# Altium PCB TMS320VC5509AMINI.PcbDoc
Units mil, origin at the board's own origin, x right, y up, seen from the top; angles counter-clockwise.
Board outline 2095.64 x 1938.16 mil, 4 copper layers (Top Layer, GND, VCC, Bottom Layer); 68 components, 111 nets, 395 pads, 0 vias.
Unrouted connection lines stored in the file: 263.
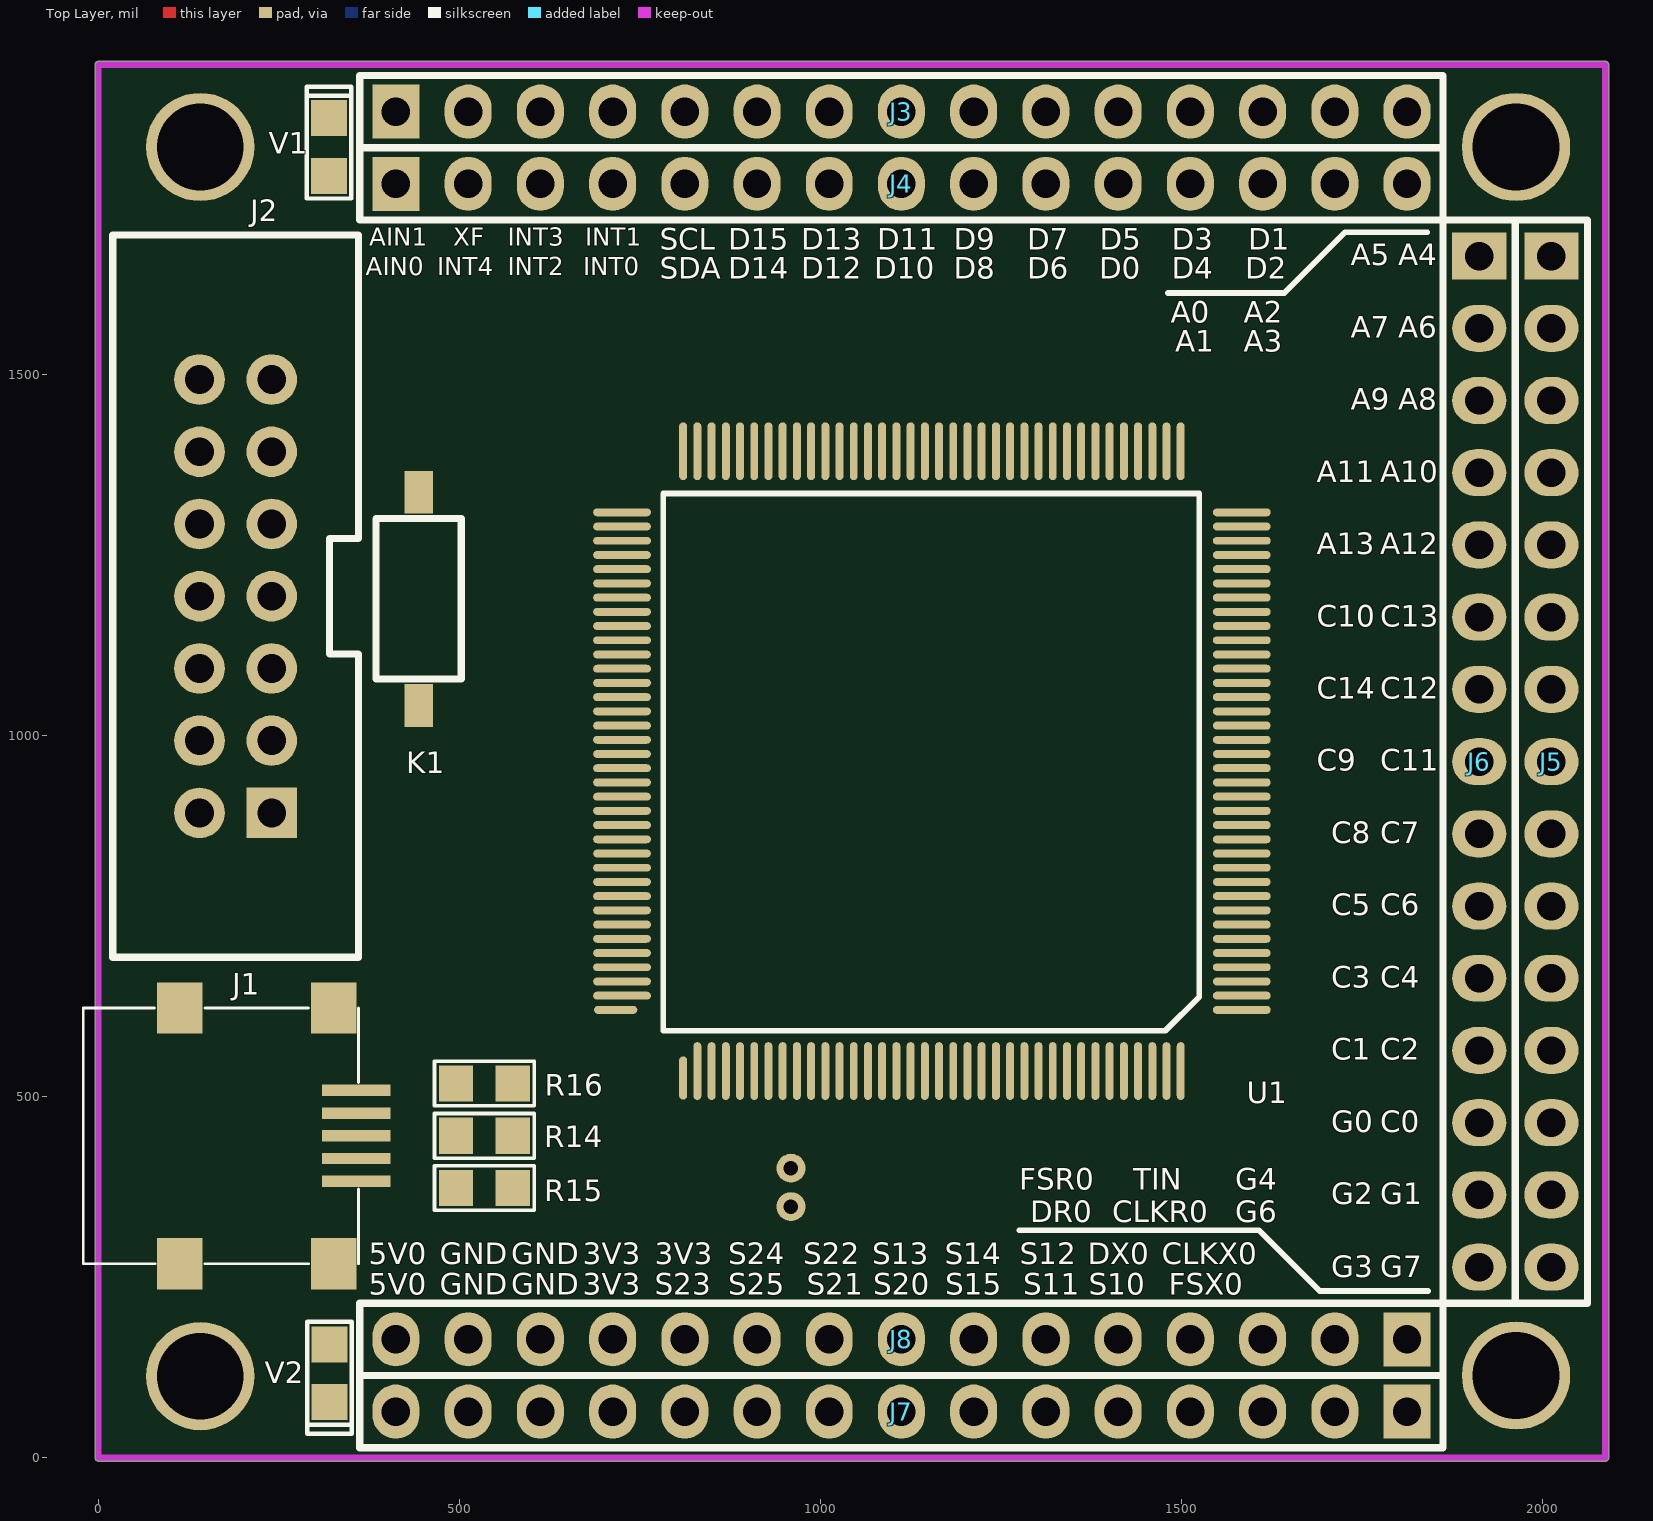
[diagram p0: Top Layer view]
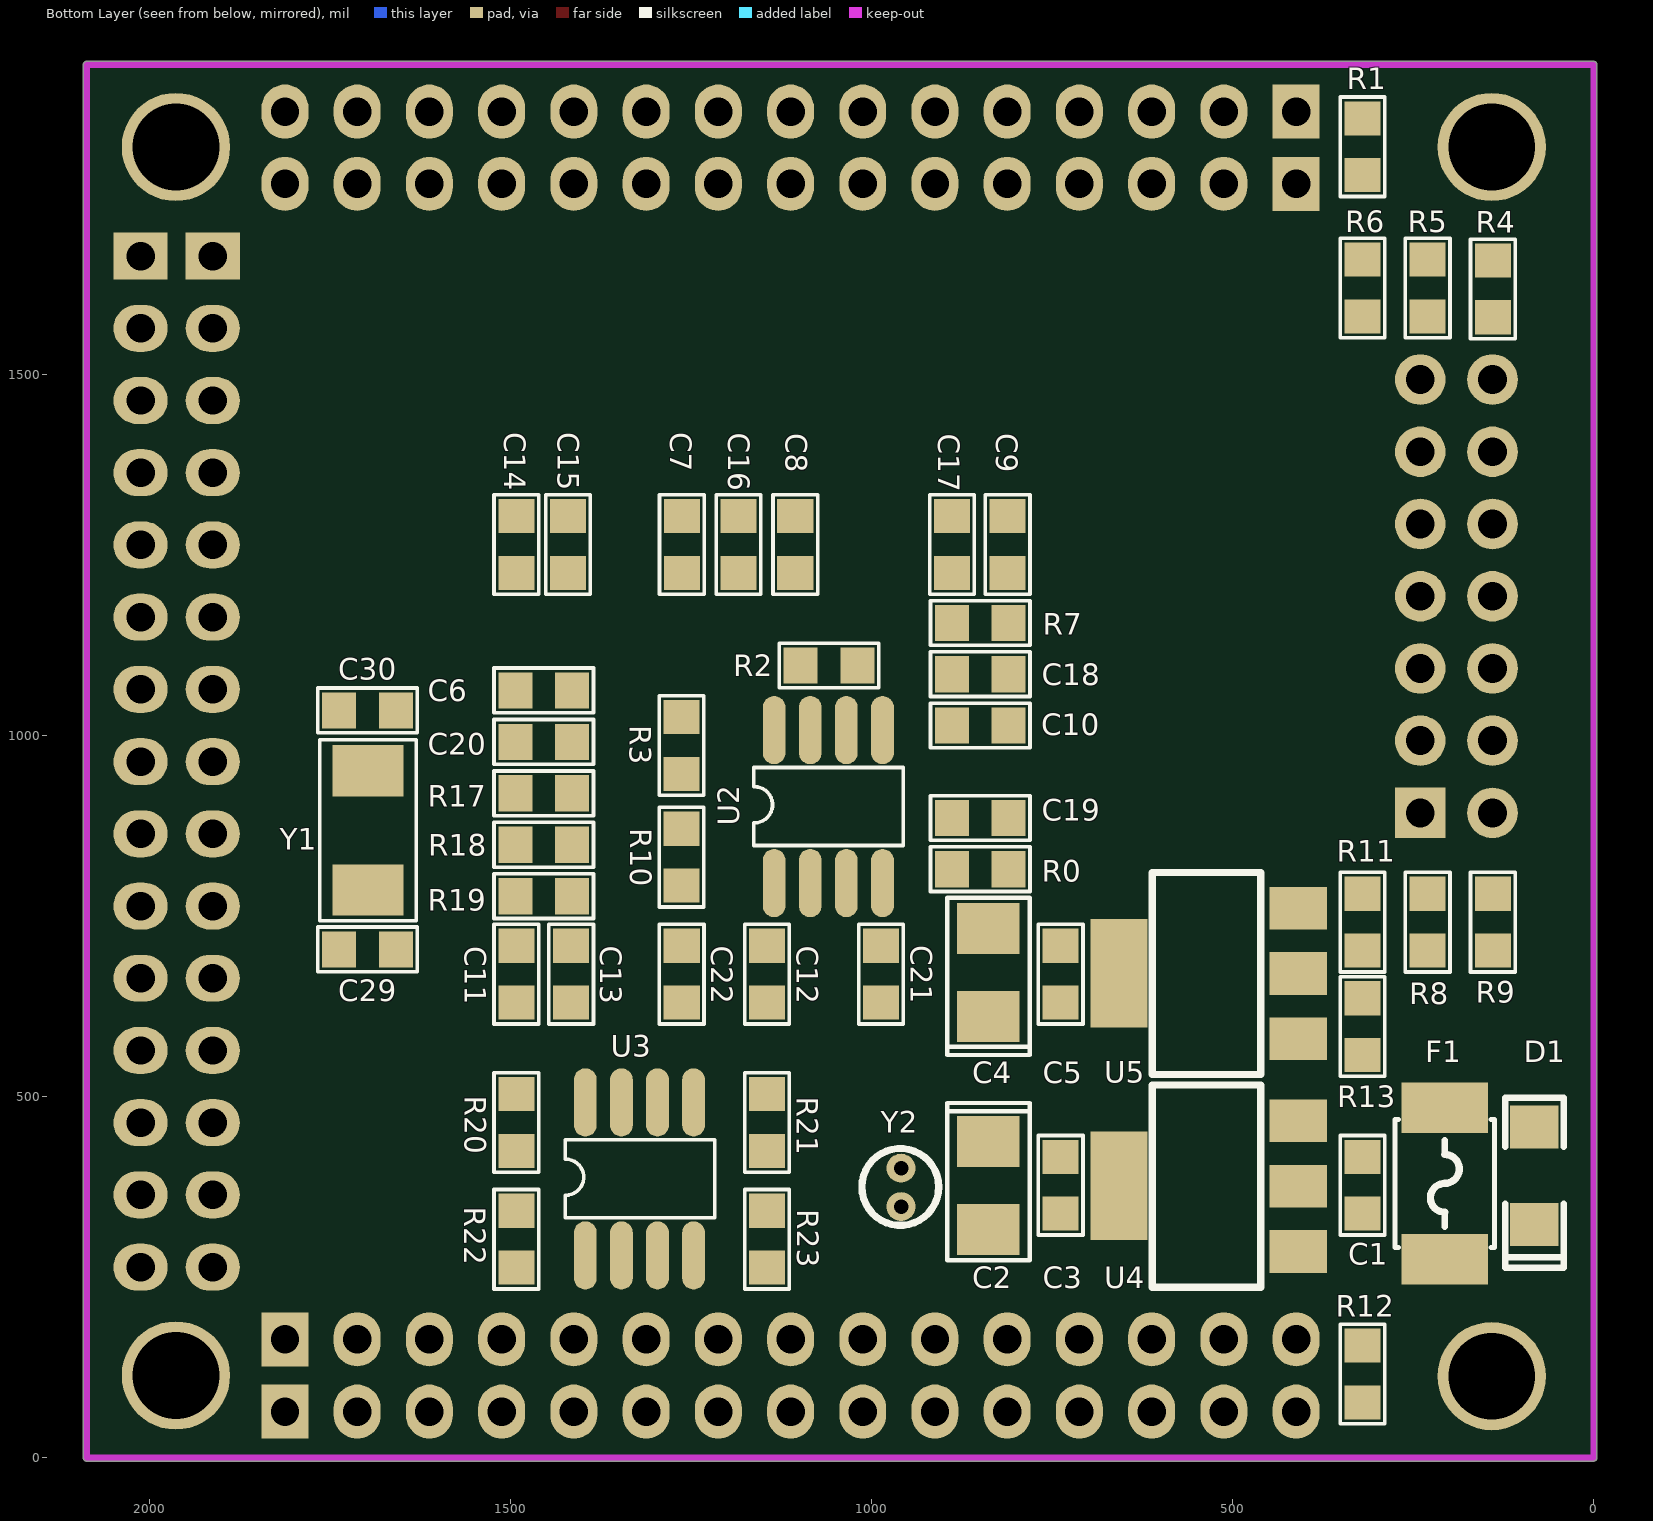
[diagram p1: Bottom Layer view, seen from below]
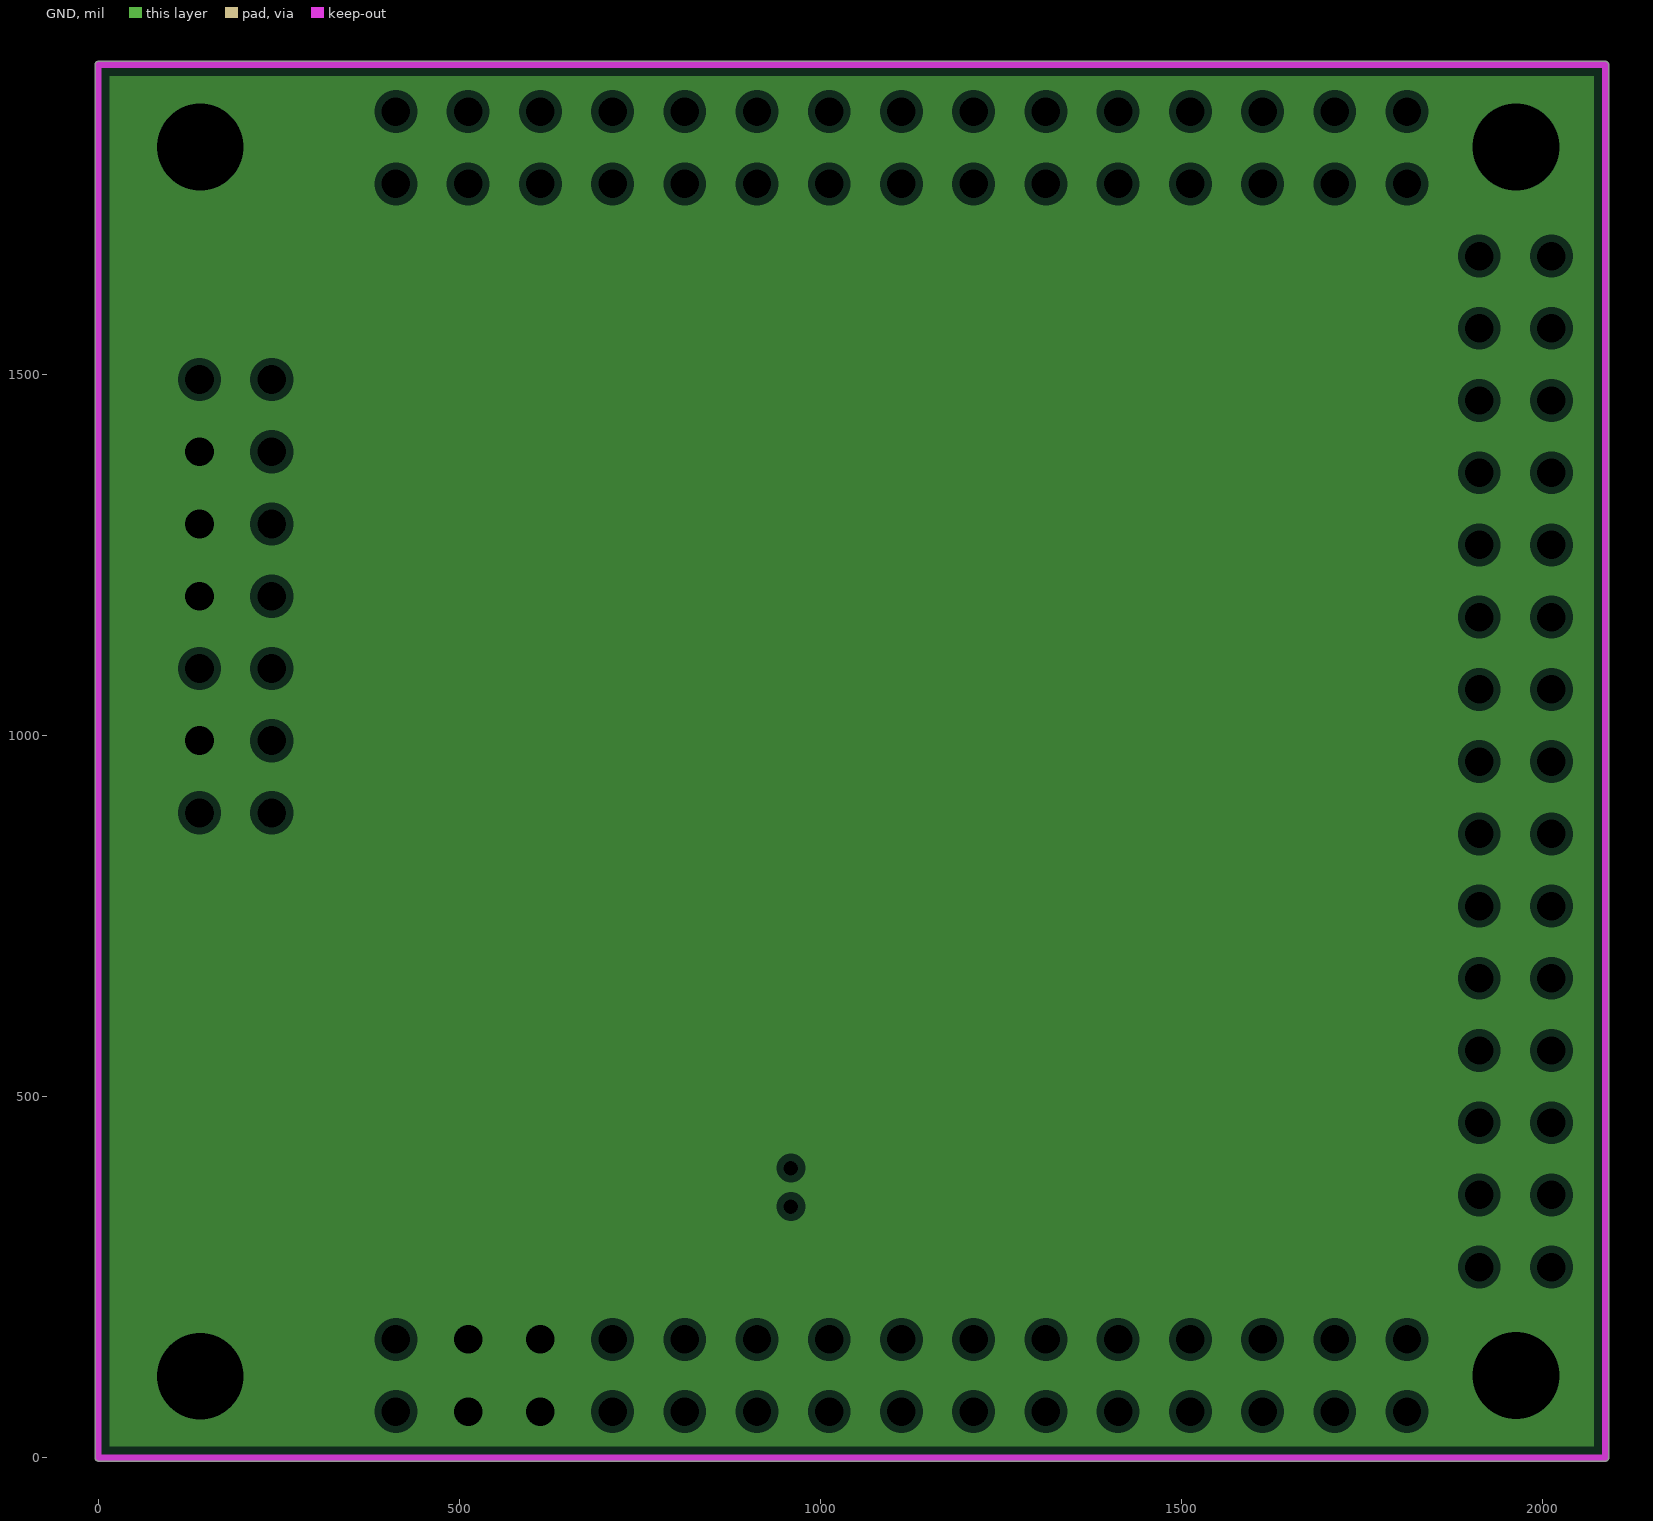
[diagram p2: GND, clearances drawn from the general rule]
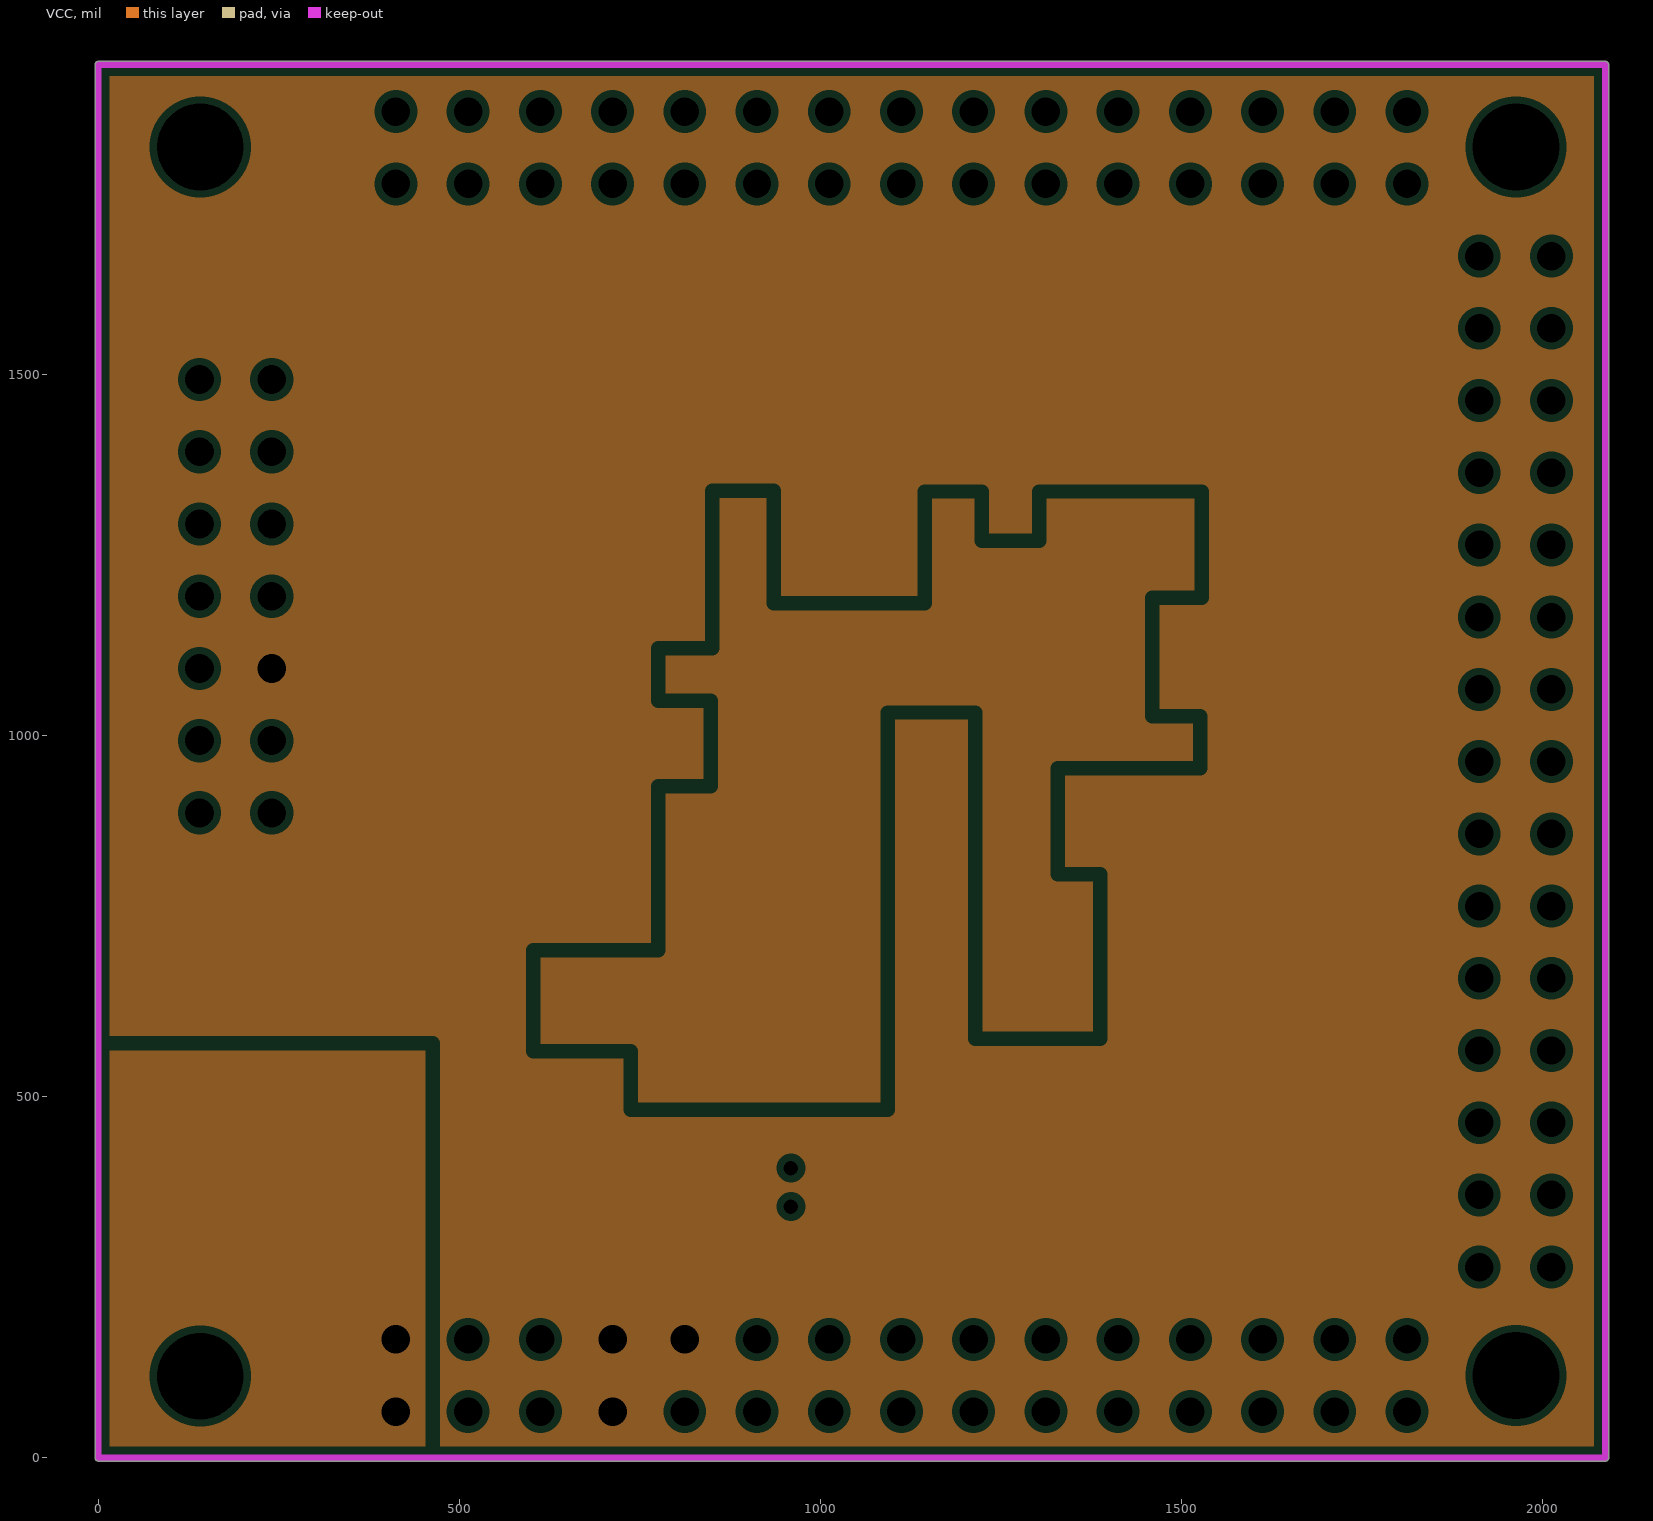
[diagram p3: VCC, clearances drawn from the general rule]

## Layer stack, top to bottom
Top Layer: signal copper 1.4
Dielectric: core 12.6, FR-4, Dk 4.8
GND: plane copper 1.4, net GND
Dielectric: prepreg 12.6, FR-4, Dk 4.8
VCC: plane copper 1.4, net (Multiple Nets)
Dielectric: core 12.6, FR-4, Dk 4.8
Bottom Layer: signal copper 1.4

## Board outline
-4.52,0 ccw(c0,0) 0,-4.52 2086.61,-4.52 ccw(c2086.61,0) 2091.13,0 2091.13,1929.13 ccw(c2086.61,1929.13) 2086.61,1933.65 0,1933.65 ccw(c0,1929.13) -4.52,1929.13

## Design rules (kind name [scope] priority, off if disabled: settings)
Clearance [All] p1: gap=8
HoleSize [All] p1: absolutevalues=TRUE maxlimit=1000 minlimit=1 maxpercent=80.000 minpercent=20.000
HoleToHoleClearance [All] p1: gap=0 allowstackedmicrovias=TRUE
MinimumSolderMaskSliver [All] p1: minsoldermaskwidth=0
PlaneClearance [All] p1: clearance=10
PlaneConnect [All] p1: planeconnectstyle=Direct reliefexpansion=20 reliefentries=4 reliefconductorwidth=10 reliefairgap=10
PolygonConnect [All] p1: connectstyle=Direct reliefconductorwidth=30 reliefentries=4 polygonreliefangle="90 Angle"
RoutingVias [All] p1: holewidth=12 width=22 viastyle="Through Hole" minholewidth=12 minwidth=22 maxholewidth=50 maxwidth=100
SilkToSilkClearance [All] p1: silktosilkclearance=0
SilkscreenOverComponentPads [All] p1: minsilkscreentomaskgap=0
SolderMaskExpansion [All] p1: expansion=2
TestPointUsage [All] p1: valid=0 allowmultiple=FALSE
Testpoint [All] p1: side=15 testpointundercomponent=TRUE minsize=40 maxsize=100 preferedsize=60 minholesize=0 maxholesize=40 preferedholesize=32 testpointgrid=1 style=1023 order=0123456789
Width [All] p1: maxlimit=100 minlimit=10 preferedwidth=10
17 further rules are at their usual default settings.

## Components (designator, comment, footprint, x,y, rotation, side; value= is the part's Value field where it differs from the comment)
C1 "104" 0805_C_M 319.87,418.37 r270 bottom
C2 "10uf" CAP-B 837.87,438.05 r270 bottom locked
C3 "104" 0805_C_M 737.87,418.37 r270 bottom locked
C4 "10uF" CAP-B 837.87,611 r90 bottom locked
C5 "104" 0805_C_M 737.87,628.63 r90 bottom locked
C6 "104" 0805_C_M 1494.58,1062.7 r180 bottom locked
C7 "104" 0805_C_M 1262.37,1305.63 r270 bottom locked
C8 "104" 0805_C_M 1105.27,1305.63 r270 bottom locked (schematic designator C9)
C9 "104" 0805_C_M 811.19,1305.63 r270 bottom locked (schematic designator C10)
C10 "104" 0805_C_M 808.18,1014 r0 bottom locked (schematic designator C12)
C11 "104" 0805_C_M 1491.57,710.63 r270 bottom locked (schematic designator C13)
C12 "104" 0805_C_M 1144.37,628.63 r90 bottom locked (schematic designator C15)
C13 "104" 0805_C_M 1415.59,628.63 r90 bottom locked (schematic designator C16)
C14 "104" 0805_C_M 1491.57,1223.63 r90 bottom locked (schematic designator C18)
C15 "104" 0805_C_M 1420.07,1305.63 r270 bottom locked (schematic designator C19)
C16 "104" 0805_C_M 1183.82,1305.63 r270 bottom locked (schematic designator C20)
C17 "104" 0805_C_M 888.27,1305.63 r270 bottom locked (schematic designator C22)
C18 "104" 0805_C_M 808.18,1085 r0 bottom (schematic designator C23)
C19 "104" 0805_C_M 808.18,886 r0 bottom locked (schematic designator C25)
C20 "104" 0805_C_M 1494.58,991.4 r180 bottom locked (schematic designator C26)
C21 "104" 0805_C_M 986.47,710.63 r270 bottom locked (schematic designator C27)
C22 "104" 0805_C_M 1262.57,710.63 r270 bottom locked
C29 "30pF" 0805_C_M 1738.63,704 r180 bottom
C30 "30pF" 0805_C_M 1738.63,1035 r180 bottom
D1 "7.5V" 1206D 81.87,458 r270 bottom locked
F1 "0.5A" 1812F 205.87,484 r270 bottom locked
J1 "miniUSB" MINIUSB-S 361.87,509.67 r180 top locked (schematic designator USB)
J2 "Header 7X2" JTAG14 239.87,893 r180 top locked
J3 "SIP15" SIP15_2.54 411.87,1864 r90 top locked
J4 "SIP15" SIP15_2.54 411.87,1764 r90 top locked
J5 "SIP15" SIP15_2.54 2011.87,1664 r0 top locked
J6 "SIP15" SIP15_2.54 1911.87,1664 r0 top locked
J7 "SIP15" SIP15_2.54 1811.87,64 r270 top locked
J8 "SIP15" SIP15_2.54 1811.87,164 r270 top locked
K1 "KEY1" KEY2 443.37,1337 r270 top locked (schematic designator RESET)
R0 "0" 0805_R_M#1 890.18,815 r180 bottom locked
R1 "2.2k" 0805_R_M#1 319.87,1856.37 r270 bottom
R2 "10K" 0805_R_M#1 1017.47,1097 r0 bottom locked
R3 "1K" 0805_R_M#1 1262.87,945.37 r90 bottom locked
R4 "10K" 0805_R_M#1 139.37,1577.63 r90 bottom locked
R5 "10K" 0805_R_M#1 229.62,1578.63 r90 bottom
R6 "10K" 0805_R_M#1 319.87,1578.63 r90 bottom
R7 "10K" 0805_R_M#1 808.18,1156 r0 bottom
R8 "10K" 0805_R_M#1 229.62,782.63 r270 bottom locked
R9 "10K" 0805_R_M#1 139.37,782.63 r270 bottom locked
R10 "1.5K" 0805_R_M#2 1262.87,831.63 r270 bottom locked
R11 "220" 0805_R_M#1 319.87,782.63 r270 bottom (schematic designator R14)
R12 "2.2K" 0805_R_M#1 319.87,75 r90 bottom
R13 "68" 0805_R_M#1 319.87,637.95 r270 bottom locked (schematic designator R15)
R14 "22" 0805_R_M#1 575.24,445.9 r180 top locked (schematic designator R18)
R15 "1.5k" 0805_R_M#1 575.24,373.4 r180 top locked (schematic designator R17)
R16 "22" 0805_R_M#1 575.24,518.4 r180 top locked
R17 "10k" 0805_R_M#1 1412.58,920.13 r0 bottom locked (schematic designator R19)
R18 "10k" 0805_R_M#1 1412.58,848.87 r0 bottom locked (schematic designator R20)
R19 "10k" 0805_R_M#1 1412.58,777.6 r0 bottom locked (schematic designator R21)
R20 "10k" 0805_R_M#1 1491.57,423.37 r90 bottom (schematic designator R22)
R21 "10K" 0805_R_M#1 1144.37,505.37 r270 bottom locked (schematic designator R25)
R22 "10K" 0805_R_M#1 1491.57,261.64 r90 bottom locked (schematic designator R24)
R23 "10K" 0805_R_M#1 1144.37,261.64 r90 bottom locked
U1 "TMS320VC5509A" TMS320C5509APGE 1583.2,620.2 r180 top locked
U2 "TPS3307-18" SOP8 1134.57,795.8 r90 bottom locked
U3 "AT25256" SOP8 1396.07,280.15 r90 bottom locked
U4 "AMS1117-3.3" LM1117 408.87,285.69 r90 bottom locked (schematic designator AMS1117-3.3)
U5 "AMS1117ADJ" LM1117 408.87,580 r90 bottom locked (schematic designator AMS1117-1.8)
V1 "LED" 0805D 319,1775 r90 top
V2 "LED" 0805D 320,157 r270 top
Y1 "12M" 5032 1697,951.35 r270 bottom (schematic designator X1)
Y2 "32.768k" DT-26 958.87,347.85 r90 bottom locked

## Footprints (in the part's own frame and the unit in brackets; to place one, negate y for a bottom-side part, rotate by r counter-clockwise, add the part's x,y. Pads: shape width x height; smd on the part's side, far side on the other; paste and mask are expansions set on the pad)
0805_C_M [mm]
  rect 1.2x1.27 smd mask+0.051: 1(0.041,0) 2(2.041,0)
  silkscreen extent -0.71,-0.78 2.79,0.78, body extent -0.01,-0.65 2.09,0.65, height 1.1
0805_R_M#1 [mm]
  rect 1.2x1.27 smd mask+0.051: 1(0.041,0) 2(2.041,0)
  silkscreen extent -0.71,-0.78 2.79,0.78, body extent -0.01,-0.65 2.09,0.65, height 0.51
0805_R_M#2 [mm]
  rect 1.2x1.27 smd mask+0.051: 1(-1,0) 2(1,0)
  silkscreen extent -1.75,-0.78 1.75,0.78, body extent -1.05,-0.65 1.05,0.65, height 0.51
0805D [mil]
  rect 50x50 smd mask+2: 1(0,0) 2(80,0)
  silkscreen extent -31,-31 124,31, body extent -7,-25 87,25, height 39
1206D [mil]
  rect 60x66.93 smd: 1(0,0) 2(135,0)
  silkscreen extent -40,-40 195,40, body extent 0,-37 130,37, height 63
1812F [mil]
  rect 70x120 smd mask+3: 1(-1,0) 2(209,0)
  silkscreen extent 15,-69 193,69, body extent -11,-69 222,68, height 43
5032 [mm]
  rect 1.8x2.5 smd mask+0.051: 1(0,0) 2(4.2,0)
  silkscreen extent -1.1,-1.7 5.28,1.7, body extent -1.1,-1.7 5.28,1.7, height 1.2
CAP-B [mm]
  rect 1.8x2.2 smd mask+0.051: 1(0,0) 2(3.1,0)
  silkscreen extent -1.35,-1.45 4.17,1.45, body extent -0.23,-1.44 3.39,1.43, height 2
DT-26 [mil]
  round 40 hole 20: 1(0,0) 2(53.15,0)
  silkscreen extent -26,-52 80,54, body extent -19,-45 75,49, height 236
JTAG14 [mil]
  rect 70x70 hole 40: 1(0,0)
  round 70 hole 40: 2(100,0) 3(0,-100) 4(100,-100) 5(0,-200) 6(100,-200) 7(0,-300) 8(100,-300) 9(0,-400) 10(100,-400) 11(0,-500) 12(100,-500) 13(0,-600) 14(100,-600)
  silkscreen extent -120,-800 220,200, body extent -125,-803 224,204, height 315
KEY2 [mm]
  rect 1.5x1 smd mask+0.051: 1(0,0) 2(7.5,0)
  silkscreen extent 0.92,-1.5 6.57,1.5, body extent 0.92,-1.51 6.59,1.55, height 2.55
LM1117 [mil]
  rect 59x79 smd: 1(0,0) 2(90.55,0) 3(181.1,0)
  rect 150x79 smd: 4(91,248)
  silkscreen extent -49,52 231,202, body extent -52,-16 231,269, height 50
MINIUSB-S [mm]
  rect 1.6x1.8 smd: 0(0.925,6.121) 0(0.925,-2.879) 0(6.325,6.121) 0(6.325,-2.879)
  rect 2.4x0.4 smd: 1(0.125,0.021) 2(0.125,0.821) 3(0.125,1.621) 4(0.125,2.421) 5(0.125,3.221)
  silkscreen extent 0.05,-2.88 9.72,6.12, body extent 0.03,-2.9 9.73,6.15, height 5
SIP15_2.54 [mil]
  rect 75x65 hole 39.37: 1(0,0)
  oval 75x65 hole 39.37: 2(0,-100) 3(0,-200) 4(0,-300) 5(0,-400) 6(0,-500) 7(0,-600) 8(0,-700) 9(0,-800) 10(0,-900) 11(0,-1000) 12(0,-1100) 13(0,-1200) 14(0,-1300) 15(0,-1400)
  silkscreen extent -50,-1450 50,50
SOP8 [mm]
  oval 2.4x0.8 smd: 1(0,0) 2(0,-1.27) 3(0,-2.54) 4(0,-3.81) 5(5.381,-3.81) 6(5.381,-2.54) 7(5.381,-1.27) 8(5.381,0)
  silkscreen extent 1.32,-4.55 4.06,0.71, body extent -0.08,-4.6 5.38,0.79, height 1.27
TMS320C5509APGE [mil]
  oval 80x11 smd: 1(0,0) 2(0,-19.69) 3(0,-39.37) 4(0,-59.06) 5(0,-78.74) 6(0,-98.43) 7(0,-118.11) 8(0,-137.8) 9(0,-157.48) 10(0,-177.17) 11(0,-196.85) 12(0,-216.54) 13(0,-236.22) 14(0,-255.91) 15(0,-275.59) 16(0,-295.28) 17(0,-314.96) 18(0,-334.65) 19(0,-354.33) 20(0,-374.02) 21(0,-393.7) 22(0,-413.39) 23(0,-433.07) 24(0,-452.76) 25(0,-472.44) 26(0,-492.13) 27(0,-511.81) 28(0,-531.5) 29(0,-551.18) 30(0,-570.87) 31(0,-590.55) 32(0,-610.24) 33(0,-629.92) 34(0,-649.61) 35(0,-669.29) 36(0,-688.98) 73(858.27,-688.98) 74(858.27,-669.29) 75(858.27,-649.61) 76(858.27,-629.92) 77(858.27,-610.24) 78(858.27,-590.55) 79(858.27,-570.87) 80(858.27,-551.18) 81(858.27,-531.5) 82(858.27,-511.81) 83(858.27,-492.13) 84(858.27,-472.44) 85(858.27,-452.76) 86(858.27,-433.07) 87(858.27,-413.39) 88(858.27,-393.7) 89(858.27,-374.02) 90(858.27,-354.33) 91(858.27,-334.65) 92(858.27,-314.96) 93(858.27,-295.28) 94(858.27,-275.59) 95(858.27,-255.91) 96(858.27,-236.22) 97(858.27,-216.54) 98(858.27,-196.85) 99(858.27,-177.17) 100(858.27,-157.48) 101(858.27,-137.8) 102(858.27,-118.11) 103(858.27,-98.43) 104(858.27,-78.74) 105(858.27,-59.06) 106(858.27,-39.37) 107(858.27,-19.69)
  oval 11x80 smd: 37(84.65,-773.62) 38(104.33,-773.62) 39(124.02,-773.62) 40(143.7,-773.62) 41(163.39,-773.62) 42(183.07,-773.62) 43(202.76,-773.62) 44(222.44,-773.62) 45(242.13,-773.62) 46(261.81,-773.62) 47(281.5,-773.62) 48(301.18,-773.62) 49(320.87,-773.62) 50(340.55,-773.62) 51(360.24,-773.62) 52(379.92,-773.62) 53(399.61,-773.62) 54(419.29,-773.62) 55(438.98,-773.62) 56(458.66,-773.62) 57(478.35,-773.62) 58(498.03,-773.62) 59(517.72,-773.62) 60(537.4,-773.62) 61(557.09,-773.62) 62(576.77,-773.62) 63(596.46,-773.62) 64(616.14,-773.62) 65(635.83,-773.62) 66(655.51,-773.62) 67(675.2,-773.62) 68(694.88,-773.62) 69(714.57,-773.62) 70(734.25,-773.62) 71(753.94,-773.62) 72(773.62,-773.62) 110(753.94,84.65) 111(734.25,84.65) 112(714.57,84.65) 113(694.88,84.65) 114(675.2,84.65) 115(655.51,84.65) 116(635.83,84.65) 117(616.14,84.65) 118(596.46,84.65) 119(576.77,84.65) 120(557.09,84.65) 121(537.4,84.65) 122(517.72,84.65) 123(498.03,84.65) 124(478.35,84.65) 125(458.66,84.65) 126(438.98,84.65) 127(419.29,84.65) 128(399.61,84.65) 129(379.92,84.65) 130(360.24,84.65) 131(340.55,84.65) 132(320.87,84.65) 133(301.18,84.65) 134(281.5,84.65) 135(261.81,84.65) 136(242.13,84.65) 137(222.44,84.65) 138(202.76,84.65) 139(183.07,84.65) 140(163.39,84.65) 141(143.7,84.65) 142(124.02,84.65) 143(104.33,84.65) 144(84.65,84.65)
  oval 60x11 smd: 108(867.07,0)
  oval 11x60 smd: 109(773.62,94.35)
  silkscreen extent 59,-715 801,29, body extent -1,-773 859,87, height 50

## Part data
C1 C3 C5 C6 C7 C8 C9 C10 C11 C12 C13 C14 C15 C16 C17 C18 C19 C20 C21 C22: library part C3
C2 C4: library part E3
C29 C30: library part C1
D1 V1 V2: library part LED2
F1: library part FUSE1
J1: library part CON4
J2: "Header, 7-Pin, Dual row"
R0 R1 R2 R3 R4 R5 R6 R7 R8 R9 R10 R11 R12 R13 R14 R15 R16 R17 R18 R19 R20 R21 R22 R23: library part R3
U1: "TMS320VC5509"
U3: library part AT25XXX
U4 U5: library part 1117
Y1: library part CRYSTAL
Y2: library part CY1

## Free pads (board coordinates)
  round 150 hole 120: 1(140.87,1815) 2(1962.87,1815) 3(1962.87,114) 4(140.87,113)

## Nets (pads, with @x,y where several pads share a name; then routed paths per layer and width w, separated by ;. In a path a pad name is that pad's centre, name@x,y a point inside that pad or via, vN(x,y) a via of type N, cw(c..) or ccw(c..) an arc to the next point about the centre after c; other vN are vias at no path point)
A0: J3.14 U1.55
A1: J4.14 U1.54
A2: J3.15 U1.52
A3: J4.15 U1.51
A4: J5.1 U1.50
A5: J6.1 U1.48
A6: J5.2 U1.47
A7: J6.2 U1.46
A8: J5.3 U1.44
A9: J6.3 U1.43
A10: J5.4 U1.42
A11: J6.4 U1.40
A12: J5.5 U1.39
A13: J6.5 U1.38
AIN0: J4.1 U1.105
AIN1: J3.1 U1.106
C0: J5.13 U1.16
C1: J6.12 U1.17
C2: J5.12 U1.19
C3: J6.11 U1.20
C4: J5.11 U1.21
C5: J6.10 U1.22
C6: J5.10 U1.23
C7: J5.9 U1.25
C8: J6.9 U1.26
C9: J6.8 U1.27
C10: J6.6 U1.34
C11: J5.8 U1.28
C12: J5.7 U1.32
C13: J5.6 U1.35
C14: J6.7 U1.31
CLKR0: J7.2 U1.137
CLKX0: J8.4 U1.134 U3.6
D0: J4.11 U1.57
D1: J3.13 U1.58
D2: J4.13 U1.59
D3: J3.12 U1.61
D4: J4.12 U1.62
D5: J3.11 U1.63
D6: J4.10 U1.65
D7: J3.10 U1.66
D8: J4.9 U1.67
D9: J3.9 U1.69
D10: J4.8 U1.70
D11: J3.8 U1.71
D12: J4.7 U1.74
D13: J3.7 U1.75
D14: J4.6 U1.76
D15: J3.6 U1.77
D+: J1.3 R14.2 R15.2
D-: J1.2 R16.2
DR0: J7.3 U1.135 U3.2
DX0: J8.5 U1.131 U3.5
EMU0: J2.13 R5.1 U1.79
EMU1: J2.14 R4.1 U1.80
FSR0: J8.3 U1.136
FSX0: J7.4 U1.133
GND: C1.2 C2.2 C3.2 C4.2 C5.2 C6.2 C7.2 C8.2 C9.2 C10.2 C11.2 C12.2 C13.2 C14.2 C15.2 C16.2 C17.2 C18.2 C19.2 C20.2 C21.1 C22.1 C29.1 C30.1 D1.1 J1.0 J1.5 J2.4 J2.8 J2.10 J2.12 J7.13 J7.14 J8.13 J8.14 K1.2 pad.1 pad.2 pad.3 pad.4 R0.1 R1.2 R9.2 R10.2 R13.2 R19.1 R20.1 U1.1 U1.7 U1.11 U1.33 U1.36 U1.37 U1.45 U1.60 U1.64 U1.73 U1.92 U1.100 U1.102 U1.113 U1.114 U1.115 U1.122 U1.138 U1.144 U2.4 U3.4 U4.1
GPIO0: J6.13 R17.2 U1.12
GPIO1: J5.14 R18.2 U1.10
GPIO2: J6.14 R19.2 U1.9
GPIO3: J6.15 R20.2 U1.143
GPIO4: J8.1 R22.1 U1.142 U3.1
GPIO6: J7.1 R12.2 U1.141
GPIO7: J5.15 U1.6
INT0: J4.4 U1.93
INT1: J3.4 U1.94
INT2: J4.3 U1.96
INT3: J3.3 U1.97
INT4: J4.2 U1.99
NetC1_1: C1.1 D1.2 F1.2 U4.3
NetC29_2: C29.2 U1.13 Y1.2
NetC30_2: C30.2 U1.14 Y1.1
NetK1_1: K1.1 R2.2 U2.7
NetR0_2: R0.2 U1.103 U1.108
NetR1_1: R1.1 V1.2
NetR3_1: R3.1 R10.1 U2.2
NetR11_2: R11.2 R13.1 U5.1
NetR12_1: R12.1 V2.2
NetR14_1: R14.1 U1.3
NetR15_1: R15.1 U1.2
NetR16_1: R16.1 U1.4
NetR21_2: R21.2 U3.7
NetR23_2: R23.2 U3.3
NetU1_111: U1.111 Y2.1
NetU1_112: U1.112 Y2.2
RESET: U1.91 U2.5
S10: J7.5 U1.130
S11: J7.6 U1.128
S12: J8.6 U1.129
S13: J8.8 U1.124
S14: J8.7 U1.127
S15: J7.7 U1.125
S20: J7.8 U1.123
S21: J7.9 U1.120
S22: J8.9 U1.121
S23: J7.11 U1.116
S24: J8.10 U1.119
S25: J7.10 U1.117
SCL: J3.5 U1.90
SDA: J4.5 U1.89
TCK: J2.9 J2.11 R6.1 U1.85
TDI: J2.3 R7.1 U1.82
TDO: J2.7 U1.81
TIN: J8.2 U1.140
TMS: J2.1 R8.1 U1.86
TRSTN: J2.2 R9.1 U1.84
VDD1.6: C4.1 C5.1 C14.1 C15.1 C16.1 C17.1 C18.1 C19.1 C20.1 C21.2 C22.2 R11.1 U1.18 U1.29 U1.30 U1.41 U1.53 U1.68 U1.78 U1.83 U1.87 U1.95 U1.109 U1.110 U1.118 U1.132 U2.3 U5.4
VDD3.3: C2.1 C3.1 C6.1 C7.1 C8.1 C9.1 C10.1 C11.1 C12.1 C13.1 J2.5 J7.12 J8.11 J8.12 R2.1 R3.2 R4.2 R5.2 R6.2 R7.2 R8.2 R17.1 R18.1 R21.1 R22.2 R23.1 U1.5 U1.8 U1.24 U1.49 U1.56 U1.72 U1.88 U1.98 U1.104 U1.107 U1.126 U1.139 U2.1 U2.8 U3.8 U4.4 U5.3 V1.1 V2.1
VDD5.0: F1.1 J1.1 J7.15 J8.15
XF: J3.2 U1.101
pads on no net: J1.4 J2.6 U1.15 U2.6 U4.2 U5.2

## Polygon pours and split planes (outlines as drawn)
GND on GND (split plane): 2071.03,15.58 15.58,15.58 15.58,1913.55 2071.03,1913.55
VDD3.3 on VCC (split plane): 2071.03,15.58 473.09,15.58 473.09,574 472.74,576.61 471.73,579.04 470.13,581.13 468.04,582.74 465.61,583.74 463,584.09 15.58,584.09 15.58,1913.55 2071.03,1913.55
VDD1.6 on VCC (split plane): 924.79,1183 925.13,1180.39 926.14,1177.96 927.74,1175.87 929.83,1174.26 932.26,1173.26 934.87,1172.91 1143.87,1172.91 1146.48,1173.26 1148.92,1174.26 1151.01,1175.87 1152.61,1177.96 1153.62,1180.39 1153.96,1183 1153.96,1327.91 1212.79,1327.91 1212.79,1270 1213.13,1267.39 1214.14,1264.96 1215.74,1262.87 1217.83,1261.26 1220.26,1260.26 1222.87,1259.91 1302.87,1259.91 1305.48,1260.26 1307.92,1261.26 1310.01,1262.87 1311.61,1264.96 1312.62,1267.39 1312.96,1270 1312.96,1327.91 1517.79,1327.91 1517.79,1201.09 1458.87,1201.09 1456.26,1200.74 1453.83,1199.74 1451.74,1198.13 1450.14,1196.04 1449.13,1193.61 1448.79,1191 1448.79,1027 1449.13,1024.39 1450.14,1021.96 1451.74,1019.87 1453.83,1018.26 1456.26,1017.26 1458.87,1016.91 1515.79,1016.91 1515.79,965.09 1328,965.09 1325.39,964.74 1322.96,963.74 1320.87,962.13 1319.26,960.04 1318.26,957.61 1317.91,955 1317.91,808 1318.26,805.39 1319.26,802.96 1320.87,800.87 1322.96,799.26 1325.39,798.26 1328,797.91 1376.91,797.91 1376.91,590.09 1223.96,590.09 1223.96,1032 1223.62,1034.61 1222.61,1037.04 1221.01,1039.13 1218.92,1040.74 1216.48,1041.74 1213.87,1042.09 1093,1042.09 1090.39,1041.74 1087.96,1040.74 1085.87,1039.13 1084.26,1037.04 1083.26,1034.61 1082.91,1032 1082.91,492.09 746.96,492.09 746.96,563 746.62,565.61 745.61,568.04 744.01,570.13 741.92,571.74 739.48,572.74 736.87,573.09 611.96,573.09 611.96,692.91 774.87,692.91 777.48,693.26 779.92,694.26 782.01,695.87 783.61,697.96 784.62,700.39 784.96,703 784.89,703.5 784.96,704 784.96,873 784.96,919.91 847.87,919.91 850.48,920.26 852.92,921.26 855.01,922.87 856.61,924.96 857.62,927.39 857.96,930 857.96,1048 857.62,1050.61 856.61,1053.04 855.01,1055.13 852.92,1056.74 850.48,1057.74 847.87,1058.09 784.96,1058.09 784.96,1110.91 849.87,1110.91 852.48,1111.26 854.92,1112.26 857.01,1113.87 858.61,1115.96 859.62,1118.39 859.96,1121 859.96,1328.91 924.79,1328.91
VDD5.0 on VCC (split plane): 452.91,15.58 15.58,15.58 15.58,563.91 452.91,563.91

## Keep-outs
Keep-Out Layer:
  lines w9: 0,0 0,1929.13 2086.61,1929.13 2086.61,0 0,0

## Other copper
Bottom Layer:
  pour cut-out: 412,218 412,0 712,0 712,217 713,218
  pour cut-out: 118.29,1691.62 119.29,1692.62 340.96,1692.62 340.96,1680.09 319.87,1659
VCC (plane layer: these items are gaps in the copper):
  lines w20: -4.52,574 463,574 463,11 ; 773.87,703 774.87,704 774.87,873 ; 774.87,703 601.87,703 601.87,563 736.87,563 736.87,482 1093,482 1093,1032 1213.87,1032 1213.87,580 1387,580 1387,808 1328,808 1328,955 1387,955 1525.87,955 1525.87,1027 1458.87,1027 1458.87,1191 1527.87,1191 1527.87,1338 1302.87,1338 1302.87,1270 1222.87,1270 1222.87,1338 1143.87,1338 1143.87,1183 934.87,1183 934.87,1339 849.87,1339 849.87,1121 774.87,1121 774.87,1048 847.87,1048 847.87,930 774.87,930 774.87,851

## Silkscreen, mask and mechanical layers (free items; w line width, h text height)
Top Overlay:
  lines w8: 1275,315 1607,315 1691,231 1841,231 ; 1481,1613 1642,1613 1726,1697 1840,1697
  text "AIN1" at 375,1678 h25
  text "XF" at 491,1678 h25
  text "INT3" at 566.67,1678 h25
  text "INT1" at 674,1678 h25
  text "SCL" at 777,1673 h30
  text "D15" at 872,1673 h30
  text "D13" at 973,1673 h30
  text "D11" at 1078,1673 h30
  text "D9" at 1184,1673 h30
  text "D7" at 1286.21,1673 h30
  text "D5" at 1386.21,1673 h30
  text "D3" at 1486,1673 h30
  text "D1" at 1592.21,1673 h30
  text "A5" at 1734,1651 h30
  text "A4" at 1800,1651 h30
  text "AIN0" at 370,1637.41 h25
  text "INT4" at 469.33,1637.41 h25
  text "INT2" at 566.67,1637.41 h25
  text "INT0" at 671,1637.41 h25
  text "SDA" at 777.5,1632.41 h30
  text "D14" at 872,1632.41 h30
  text "D12" at 973,1632.41 h30
  text "D10" at 1074,1632.41 h30
  text "D8" at 1184,1632.41 h30
  text "D6" at 1286,1632.41 h30
  text "D0" at 1386,1632.41 h30
  text "D4" at 1486,1632.41 h30
  text "D2" at 1588,1632.41 h30
  text "A0" at 1485,1572 h30
  text "A2" at 1586,1572 h30
  text "A7" at 1734,1551 h30
  text "A6" at 1800,1551 h30
  text "A1" at 1491,1531.41 h30
  text "A3" at 1586,1531.41 h30
  text "A9" at 1734,1451 h30
  text "A8" at 1800,1451 h30
  text "A11" at 1687,1351 h30
  text "A10" at 1775,1351 h30
  text "A13" at 1687,1251 h30
  text "A12" at 1775,1251 h30
  text "C10" at 1687,1151 h30
  text "C13" at 1775,1151 h30
  text "C14" at 1687,1051 h30
  text "C12" at 1775,1051 h30
  text "C9" at 1687,951 h30
  text "C11" at 1775,951 h30
  text "C8" at 1707,851 h30
  text "C7" at 1775,851 h30
  text "C5" at 1707,751 h30
  text "C6" at 1775,751 h30
  text "C3" at 1707,651 h30
  text "C4" at 1775,651 h30
  text "C1" at 1707,551 h30
  text "C2" at 1775,551 h30
  text "G0" at 1707,451 h30
  text "C0" at 1775,451 h30
  text "FSR0" at 1275,371 h30
  text "TIN" at 1433,371 h30
  text "G4" at 1574,371 h30
  text "G2" at 1707,351 h30
  text "G1" at 1775,351 h30
  text "DR0" at 1290,326 h30
  text "CLKR0" at 1404,326 h30
  text "G6" at 1574,326 h30
  text "5V0" at 374,268 h30
  text "GND" at 472.8,268 h30
  text "GND" at 571.6,268 h30
  text "3V3" at 670.4,268 h30
  text "3V3" at 770.2,268 h30
  text "S24" at 872,268 h30
  text "S22" at 976,268 h30
  text "S13" at 1071.5,268 h30
  text "S14" at 1172,268 h30
  text "S12" at 1275.5,268 h30
  text "DX0" at 1370,268 h30
  text "CLKX0" at 1472,268 h30
  text "G3" at 1707,250 h30
  text "G7" at 1775,250 h30
  text "5V0" at 374,226 h30
  text "GND" at 472.8,226 h30
  text "GND" at 571.6,226 h30
  text "3V3" at 670.4,226 h30
  text "S23" at 770.2,226 h30
  text "S25" at 872,226 h30
  text "S21" at 980.8,226 h30
  text "S20" at 1072.6,226 h30
  text "S15" at 1172.4,226 h30
  text "S11" at 1280.2,226 h30
  text "S10" at 1371,226 h30
  text "FSX0" at 1482,226 h30